# Altium PCB IM_v1.0.PcbDoc (part 3 of 4)
Units mm, origin at the board's own origin, x right, y up, seen from the top; angles counter-clockwise.
Board outline 120 x 85 mm, 6 copper layers (Top Layer, S1, S2, S3, S4, Bottom Layer), stack 1.546 mm thick; 285 components, 245 nets, 1048 pads, 483 vias.
Unrouted connection lines stored in the file: 53.
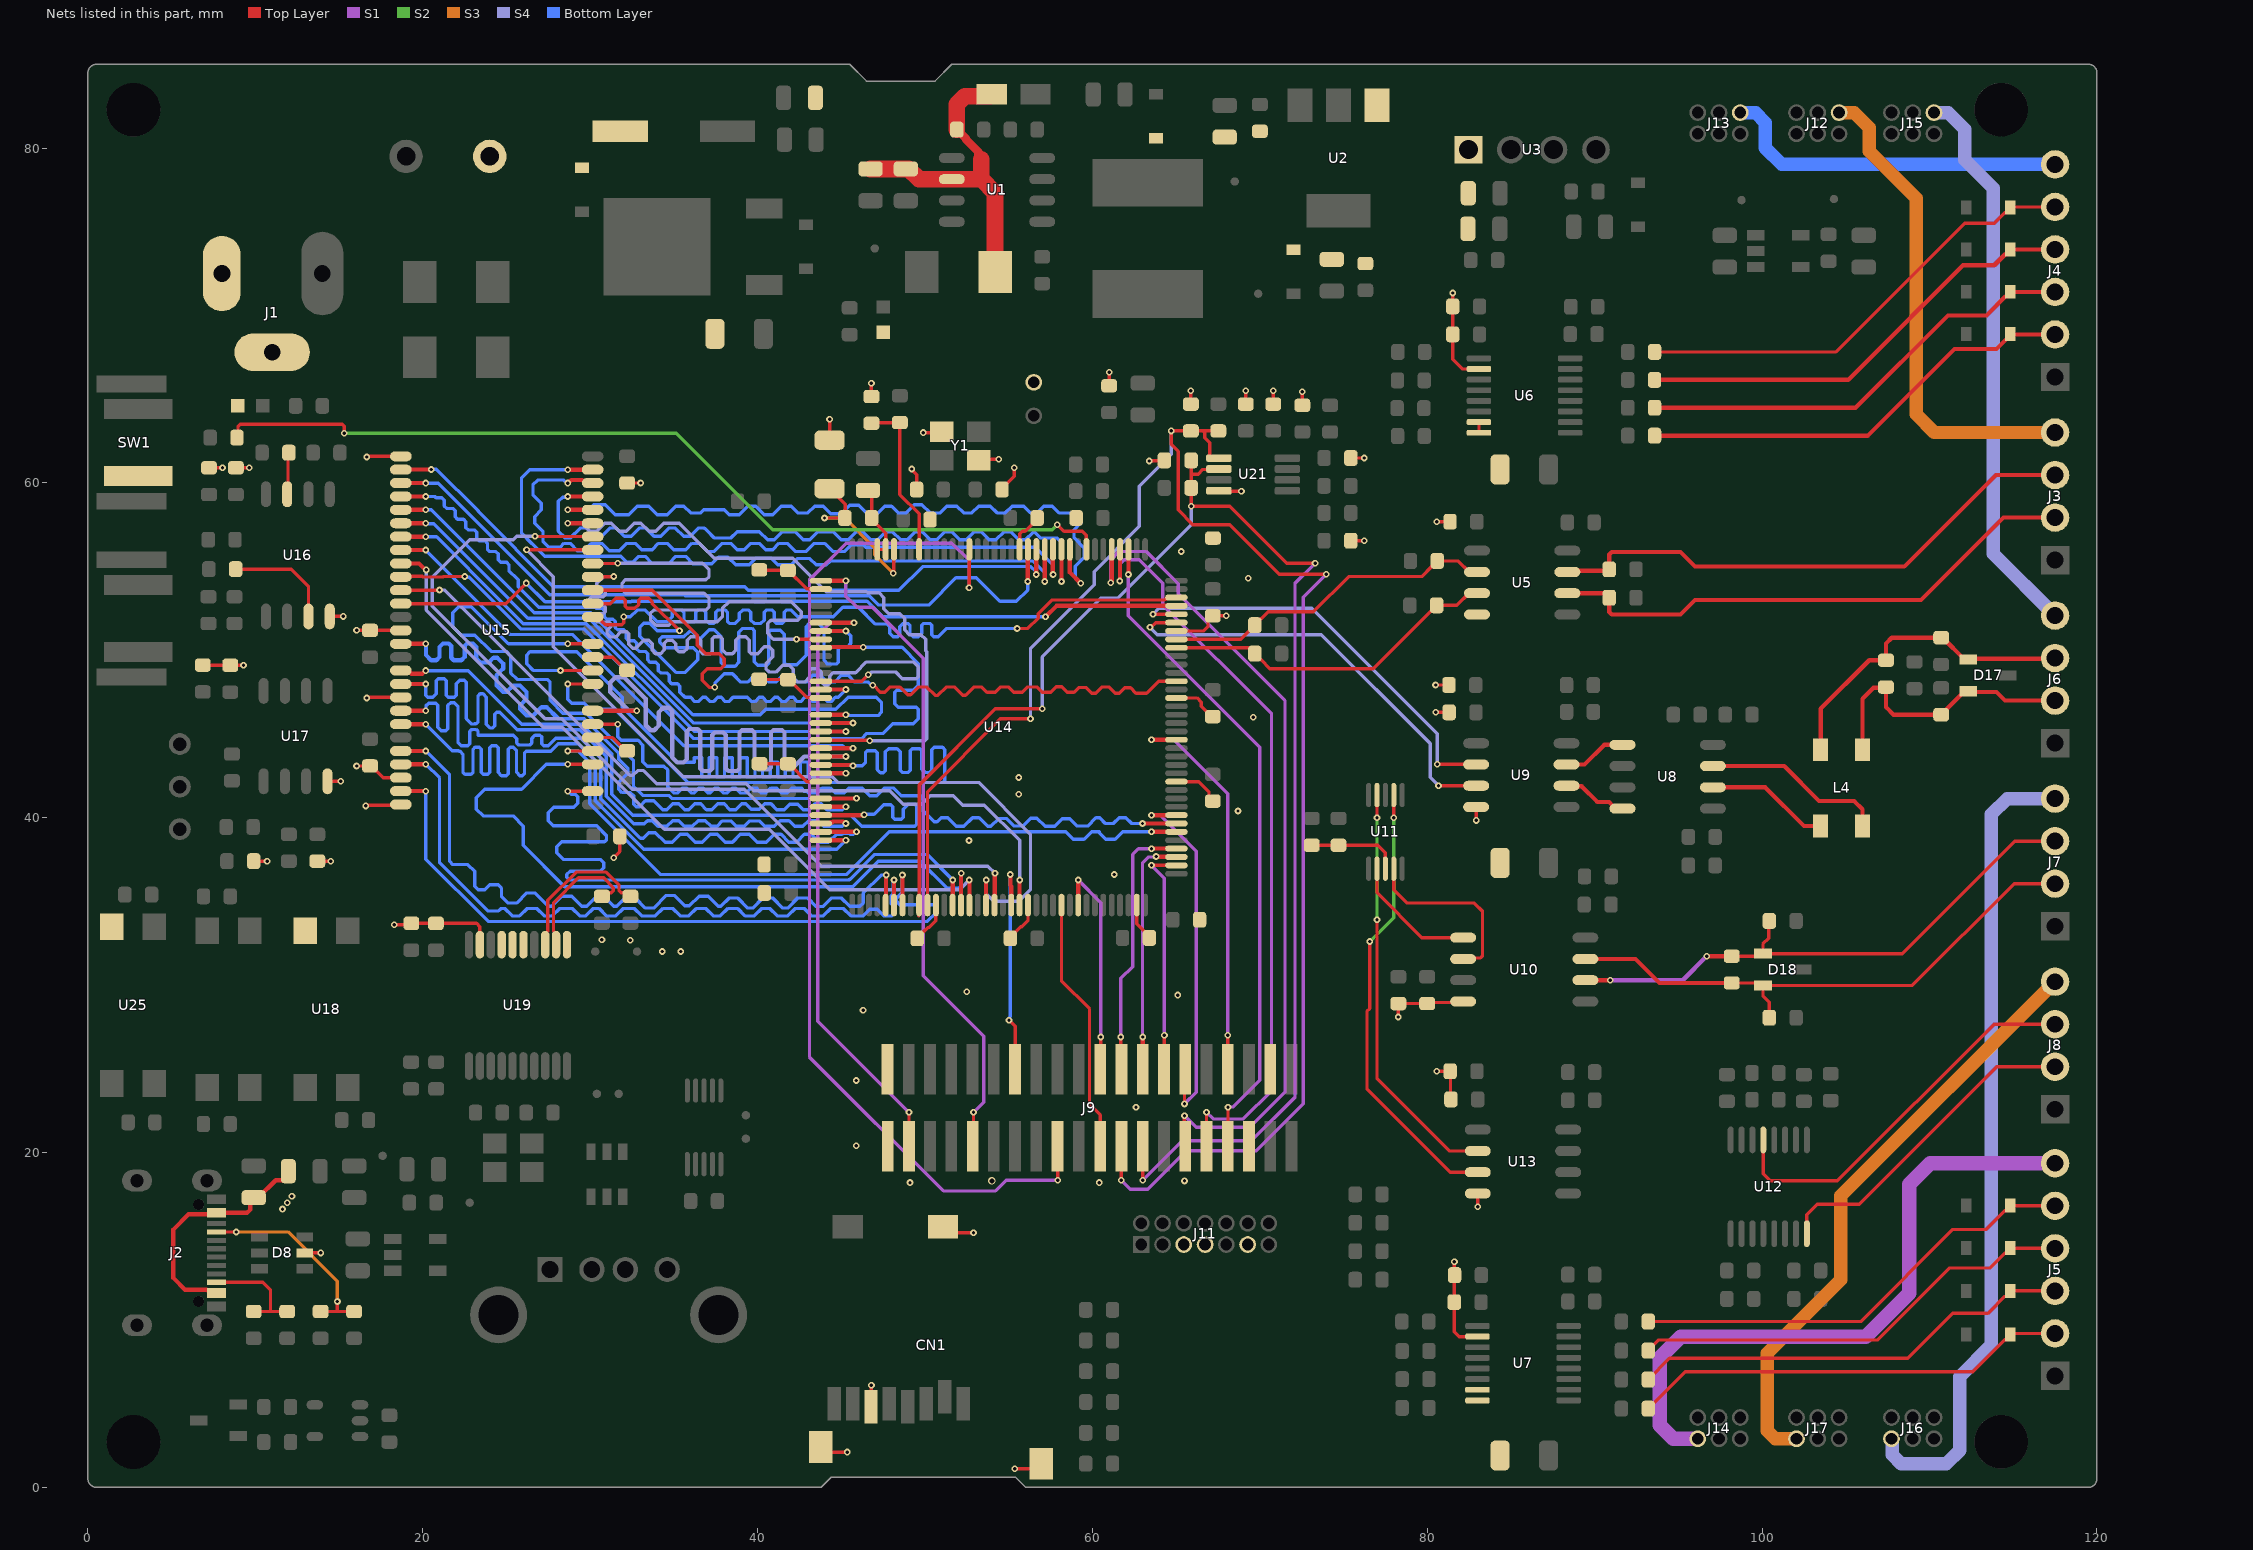
[diagram p6: the nets of this part, all layers, seen from the top]

## Via types
v1: diameter 0.4, hole 0.2, Top Layer to Bottom Layer, tented both sides, 474 vias
v2: diameter 0.4, hole 0.2, Top Layer to Bottom Layer, 8 vias
v3: diameter 0.45, hole 0.3, Top Layer to Bottom Layer, tented both sides, 1 vias

## Nets (pads, with @x,y where several pads share a name; then routed paths per layer and width w, separated by ;. In a path a pad name is that pad's centre, name@x,y a point inside that pad or via, vN(x,y) a via of type N, cw(c..) or ccw(c..) an arc to the next point about the centre after c; other vN are vias at no path point) (continued)
+VUSB: C17.2 D8.5 FB5.1 J2.A4-B9 J2.B4-A9 | length 15.6
  Top Layer w0.2: D8.5@12.95,14 v1@14,14
  Top Layer w0.254: J2.B4-A9@7.686,11.6 7.521,11.765 7.127,11.765 7.093,11.8 5.8,11.8 5.1,12.5 5.1,15.4 6.006,16.306 7.592,16.306 J2.A4-B9@7.686,16.4 9.5,16.4 9.7,16.6 9.7,17.1 C17.2@9.9,17.3 10.175,17.3 11.217,18.341 11.651,18.341 11.967,18.657 FB5.1@11.967,18.879
  other v1: 13.9,14 11.617,16.617 11.9,17 12.183,17.383
\H\O\L\D\: R50.2 U16.7 | length 2.5
  Top Layer w0.2: U16.7@11.902,59.32 11.951,59.369 11.951,61.751 R50.2@12,61.8
\W\P\: R49.2 U16.3 | length 6.6
  Top Layer w0.2: R49.2@8.824,54.845 12.155,54.845 13.172,53.828 U16.3@13.172,52.02
A: D18.1 J7.3 R38.2 R39.1 U10.6 | length 33.6
  Top Layer w0.2: R38.2@98.188,31.725 99.903,31.725 D18.1@100.053,31.875 ; R39.1@100.432,33.829 100.4,33.797 100.4,32.8 100.053,32.453 D18.1@100.053,31.875 ; J7.3@117.5,38.598 115.098,38.598 108.375,31.875 D18.1@100.053,31.875
  Top Layer w0.254: U10.6@89.445,30.29 v1(90.94,30.29) ; v1(96.693,31.725) R38.2@98.188,31.725
  S1 w0.254: v1(90.94,30.29) 95.258,30.29 v1(96.693,31.725)
ADC_1: R74.2 R75.1 U14.28 | length 9.8
  Top Layer w0.2: R75.1@46.798,63.556 46.82,63.578 48.478,63.578 R74.2@48.5,63.6 48.5,59.3 49.65,58.15 U14.28@49.65,56.02
AGND: C61.2 R48.1 U14.31 | length 10.5
  Top Layer w0.2: v1(44,57.9) C61.2@45.211,57.9 45.234,57.923 45.234,58.716 R48.1@44.3,59.65 ; v1(48.1,54.6) 48.125,54.625 48.125,55.995 U14.31@48.15,56.02
  S3 w0.2: v1(44,57.9) 45.2,57.9 47,56.1 47,55.7 v1(48.1,54.6)
AVDD: C61.1 FB4.2 U14.32 U14.33 | length 4.5
  Top Layer w0.2: FB4.2@46.6,59.55 46.811,59.339 46.811,57.834 47.65,56.995 U14.32@47.65,56.02 U14.33@47.15,56.02
B: D18.2 J7.2 R37.2 R38.1 U10.7 | length 33.3
  Top Layer w0.2: R38.1@98.188,30.125 99.903,30.125 D18.2@100.053,29.975 ; R37.2@100.432,28.047 100.432,28.968 100.053,29.347 D18.2@100.053,29.975 ; J7.2@117.5,36.058 115.058,36.058 108.975,29.975 D18.2@100.053,29.975
  Top Layer w0.254: U10.7@89.445,31.56 92.44,31.56 93.875,30.125 R38.1@98.188,30.125
BOOTLOADER_EN: R85.2 U14.8 | length 55.5
  Top Layer w0.2: R85.2@8.9,62.7 8.958,62.758 8.958,63.358 9.1,63.5 15.183,63.5 15.3,63.383 v1(15.3,62.968) ; v1(57.9,57.5) 58.3,57.1 59.4,57.1 59.621,56.879 59.621,56.049 U14.8@59.65,56.02
  S2 w0.2: v1(15.3,62.968) 35.132,62.968 40.9,57.2 57.6,57.2 v1(57.9,57.5)
CANH: U8.1 U9.7 | length 3.8
  Top Layer w0.254: U9.7@88.321,43.174 89.396,43.174 90.571,44.349 U8.1@91.662,44.349
CANL: U8.4 U9.6 | length 3.9
  Top Layer w0.254: U9.6@88.321,41.904 88.349,41.876 89.224,41.876 90.161,40.939 90.865,40.939 91.265,40.539 U8.4@91.662,40.539
CC1: J2.A5 R7.1 R8.2 | length 12.2
  Top Layer w0.2: J2.A5@7.686,15.25 v1(8.85,15.25) ; R7.1@13.9,10.5 14.9,10.5 ; v1(14.9,11.1) 14.9,10.5 ; R8.2@15.9,10.5 14.9,10.5
  S3 w0.2: v1(8.85,15.25) 11.95,15.25 14.9,12.3 v1(14.9,11.1)
CC2: J2.B5 R6.1 R9.2 | length 6.7
  Top Layer w0.2: J2.B5@7.686,12.25 10.45,12.25 10.9,11.8 10.9,10.5 ; R9.2@9.9,10.5 10.9,10.5 ; R6.1@11.9,10.5 10.9,10.5
DD_N: R94.2 U19.13 | length 9.1
  Top Layer w0.2: U19.13@27.312,32.415 27.312,33.071 27.462,33.222 27.462,35.056 29.155,36.749 30.945,36.749 31.724,35.969 31.724,35.641 31.842,35.524 32.176,35.524 R94.2@32.4,35.3
DD_P: R95.2 U19.12 | length 8
  Top Layer w0.2: U19.12@27.962,32.415 27.962,33.071 27.811,33.222 27.811,34.911 29.3,36.4 30.8,36.4 31.375,35.825 31.375,35.641 31.258,35.524 30.924,35.524 R95.2@30.7,35.3
EXT_CANH: D17.2 J6.2 L4.1 R32.1 R33.1 | length 17
  Top Layer w0.254: L4.1@106,44.05 106,47.104 106.655,47.759 107.359,47.759 R32.1@107.4,47.8 107.4,47.706 107.4,46.6 107.85,46.15 R33.1@110.7,46.15 ; R33.1@110.735,46.15 111.003,46.417 111.003,46.463 112.09,47.55 D17.2@112.315,47.55 112.365,47.5 114,47.5 114.508,46.992 J6.2@117.5,46.992
EXT_CANL: D17.1 J6.3 L4.2 R32.2 R34.1 | length 19.4
  Top Layer w0.254: L4.2@103.5,44.05 103.5,46.5 106.4,49.4 R32.2@107.4,49.4 107.4,50.4 107.75,50.75 R34.1@110.7,50.75 110.79,50.75 112.09,49.45 D17.1@112.315,49.45 112.356,49.491 117.459,49.491 J6.3@117.5,49.532
EXT_RS232_RX: J8.2 U12.8 | length 19.6
  Top Layer w0.2: U12.8@102.675,15.15 102.675,16.275 103.3,16.9 105.8,16.9 114.024,25.124 J8.2@117.5,25.124
EXT_RS232_TX: J8.3 U12.13 | length 23.5
  Top Layer w0.2: U12.13@100.075,20.75 100.075,18.725 100.5,18.3 104.5,18.3 113.864,27.664 J8.3@117.5,27.664
EXT_U5_VCC: J3.4 J12.6 | length 29.2
  S3 w0.8: J12.6@104.598,82.114 104.613,82.1 105.514,82.1 106.4,81.214 106.4,79.8 109.2,77 109.2,64.1 110.294,63.006 J3.4@117.5,63.006
EXT_U6_VCC: J4.6 J13.6 | length 21
  Bottom Layer w0.8: J13.6@98.7,82.114 98.714,82.1 99.614,82.1 100.2,81.514 100.2,80 101.18,79.02 J4.6@117.5,79.02
EXT_U7_VCC: J5.6 J14.6 | length 38.9
  S1 w0.87: J14.6@96.16,2.9 94.7,2.9 93.9,3.7 93.9,7.749 95.151,9 106.2,9 108.8,11.6 108.8,18.1 110.05,19.35 J5.6@117.5,19.35
EXT_U9_VCC: J6.4 J15.6 | length 33.5
  S4 w0.8: J15.6@110.27,82.114 110.284,82.1 111.114,82.1 112.1,81.114 112.1,79.3 113.8,77.6 113.8,55.772 J6.4@117.5,52.072
EXT_U10_VCC: J7.4 J16.6 | length 48.5
  S4 w0.8: J16.6@107.73,2.9 107.768,2.862 107.768,1.932 108.3,1.4 111,1.4 111.8,2.2 111.8,6.6 113.7,8.5 113.7,40.2 114.638,41.138 J7.4@117.5,41.138
EXT_U13_VCC: J8.4 J17.6 | length 35.9
  S3 w0.8: J17.6@102.058,2.9 100.786,2.9 100.3,3.386 100.3,8 104.7,12.4 104.7,17.404 J8.4@117.5,30.204
FDCAN1_RX: U9.3 U14.139 | length 26.4
  Top Layer w0.2: v1(63.437,51.37) 63.491,51.37 63.768,51.647 U14.139@65.117,51.647 ; v1(80.673,41.9) 80.677,41.904 U9.3@82.921,41.904
  S4 w0.2: v1(63.437,51.37) 63.879,50.927 73.673,50.927 80.171,44.429 80.171,42.402 v1(80.673,41.9)
FDCAN1_TX: U9.2 U14.140 | length 25.8
  Top Layer w0.2: v1(63.622,52.147) 63.623,52.148 U14.140@65.02,52.15 U14.140@65.02,52.15 ; v1(80.598,43.198) 80.61,43.186 82.909,43.186 U9.2@82.921,43.174
  S4 w0.2: v1(63.622,52.147) 63.976,52.5 73.1,52.5 80.598,45.002 v1(80.598,43.198)
FLT_CANH: L4.4 U8.7 | length 11
  Top Layer w0.254: U8.7@97.062,43.079 101.321,43.079 103.4,41 105.5,41 106,40.5 L4.4@106,39.5
FLT_CANL: L4.3 U8.6 | length 7.4
  Top Layer w0.254: U8.6@97.062,41.809 100.191,41.809 102.5,39.5 L4.3@103.5,39.5
FMC_A0: U14.10 U15.23 | length 44.3
  Top Layer w0.254: v1(28.65,58.385) U15.23@30.145,58.385 ; U14.10@58.65,56.02 58.65,54.65 v1(59.3,54)
  Bottom Layer w0.2: v1(28.65,58.385) 29.885,58.385 30.2,58.7 30.9,58.7 31.5,58.1 32.3,58.1 32.8,58.6 33.5,58.6 34,58.1 34.6,58.1 35.1,58.6 35.6,58.6 36,58.2 36.6,58.2 36.785,58.385 38.015,58.385 38.3,58.1 38.9,58.1 39.4,58.6 39.9,58.6 40.4,58.1 40.9,58.1 41.4,58.6 42,58.6 42.4,58.2 43,58.2 43.4,58.6 43.928,58.6 44.375,58.153 45.002,58.153 45.512,58.663 46.047,58.663 46.556,58.153 47.153,58.153 47.6,58.6 48,58.6 48.4,58.2 48.865,58.2 49.365,58.7 49.8,58.7 50.3,58.2 50.9,58.2 51.3,58.6 51.9,58.6 52.3,58.2 52.8,58.2 53.2,58.6 53.9,58.6 54.3,58.2 54.8,58.2 55.2,58.6 55.898,58.6 56.298,58.2 56.7,58.2 57.1,58.6 57.6,58.6 58,58.2 59.1,58.2 59.3,58 59.3,57.605 58.9,57.205 58.9,56.705 59.5,56.105 59.5,55.553 58.974,55.027 58.974,54.326 v1(59.3,54)
FMC_A1: U14.11 U15.24 | length 44.5
  Top Layer w0.254: v1(28.65,59.185) U15.24@30.145,59.185 ; v1(58.15,54.105) U14.11@58.15,56.02
  Bottom Layer w0.2: v1(28.65,59.185) 28.612,59.146 28.35,59.146 28.1,58.896 28.1,57.121 28.517,56.704 28.804,56.704 29.4,57.3 29.796,57.3 30.279,56.817 30.679,56.817 31.162,57.3 31.562,57.3 32.045,56.817 32.445,56.817 32.928,57.3 33.328,57.3 33.811,56.817 34.211,56.817 34.694,57.3 35.094,57.3 35.577,56.817 35.977,56.817 36.46,57.3 36.5,57.3 36.827,57.3 36.962,57.166 37.424,56.704 38.404,56.704 38.775,57.075 39.2,57.075 40.111,57.075 40.594,56.592 40.994,56.592 41.477,57.075 42.237,57.075 42.72,56.592 43.12,56.592 43.603,57.075 44.523,57.075 45.006,56.592 45.406,56.592 45.889,57.075 46.289,57.075 46.772,56.592 47.172,56.592 47.655,57.075 48.055,57.075 48.538,56.592 48.938,56.592 49.421,57.075 49.821,57.075 50.304,56.592 50.704,56.592 51.187,57.075 51.587,57.075 52.07,56.592 52.47,56.592 52.953,57.075 53.353,57.075 53.836,56.592 54.236,56.592 54.719,57.075 55.119,57.075 55.602,56.592 56.002,56.592 56.485,57.075 56.525,57.075 56.9,56.7 57.4,56.7 57.9,56.7 58.15,56.45 v1(58.15,54.105)
FMC_A2: U14.12 U15.25 | length 44.3
  Top Layer w0.254: v1(28.65,59.985) 28.689,59.985 28.872,60.168 29.521,60.168 29.704,59.985 U15.25@30.145,59.985 ; v1(57.65,54.525) 57.632,54.543 57.632,56.002 U14.12@57.65,56.02
  Bottom Layer w0.2: v1(28.65,59.985) 28.616,59.985 28.433,60.168 26.867,60.168 26.582,59.883 26.582,59.283 27.082,58.783 27.082,58.383 26.682,57.983 26.682,57.583 26.855,57.41 26.859,57.41 27.182,57.087 27.182,56.483 27.523,56.143 28.2,56.143 28.434,56.377 28.8,56.377 29.234,55.943 29.643,55.943 30.077,56.377 30.7,56.377 31.134,55.943 31.743,55.943 32.177,56.377 32.7,56.377 33.077,56 33.7,56 34.077,56.377 34.6,56.377 34.977,56 35.7,56 36.077,56.377 36.508,56.377 36.985,55.9 37.4,55.9 37.877,56.377 38.4,56.377 38.777,56 39.2,56 39.577,56.377 40.1,56.377 40.477,56 40.9,56 41.277,56.377 41.766,56.377 42.243,55.9 42.9,55.9 43.377,56.377 44,56.377 44.477,55.9 45.2,55.9 45.6,56.3 46.3,56.3 46.457,56.143 56.589,56.143 57.632,55.1 57.632,54.543 v1(57.65,54.525)
FMC_A3: U14.13 U15.26 | length 44.2
  Top Layer w0.254: v1(28.65,60.785) U15.26@30.145,60.785 ; v1(57.15,54.105) U14.13@57.15,56.02
  Bottom Layer w0.2: v1(28.65,60.785) 26.385,60.785 25.9,60.3 25.9,56.996 26.523,56.373 26.527,56.373 27.284,55.616 31.829,55.616 32.197,55.248 32.548,55.248 32.9,55.6 33.3,55.6 33.69,55.21 34.71,55.21 35.1,55.6 35.7,55.6 36.129,55.171 37.271,55.171 37.662,55.562 38.229,55.562 38.691,55.1 39.5,55.1 39.889,55.489 40.811,55.489 41.2,55.1 42,55.1 42.378,55.478 43.122,55.478 43.5,55.1 44.1,55.1 44.326,55.326 45.522,55.326 45.523,55.327 56.452,55.327 57.15,54.629 v1(57.15,54.105)
FMC_A4: U14.14 U15.29 | length 43.4
  Top Layer w0.254: U15.29@18.689,60.785 18.705,60.8 v1(20.5,60.8) ; v1(56.65,54.525) U14.14@56.65,56.02
  Bottom Layer w0.2: v1(20.5,60.8) 20.509,60.809 20.816,60.809 23.304,58.321 23.304,58.292 27.796,53.8 39.223,53.8 39.442,53.581 46.806,53.581 46.814,53.573 48.432,53.573 49.859,55 56.316,55 56.612,54.704 56.612,54.563 v1(56.65,54.525)
FMC_A5: U14.15 U15.30 | length 44.4
  Top Layer w0.254: U15.30@18.689,59.985 v1(20.185,59.985) ; v1(56.131,54.105) 56.14,54.115 56.14,56.01 U14.15@56.15,56.02
  Bottom Layer w0.2: v1(20.185,59.985) 20.915,59.985 27.592,53.308 35.63,53.308 35.684,53.254 46.671,53.254 47.225,52.7 50.216,52.7 51.847,54.331 53.072,54.331 54.475,52.928 55.462,52.928 56.131,53.597 v1(56.131,54.105)
FMC_A6: U14.50 U15.31 | length 38.5
  Top Layer w0.254: U15.31@18.689,59.185 v1(20.185,59.185) ; U14.50@43.78,47.65 v1(45.275,47.65)
  Bottom Layer w0.2: v1(20.185,59.185) 20.715,59.185 20.786,59.114 21.147,59.114 21.288,58.973 21.288,58.612 21.43,58.47 21.79,58.47 21.932,58.329 21.932,57.968 22.073,57.827 22.434,57.827 22.575,57.686 22.575,57.325 22.716,57.184 23.077,57.184 23.219,57.042 23.219,56.681 23.36,56.54 23.721,56.54 23.862,56.399 23.862,56.038 24.003,55.897 24.364,55.897 24.505,55.755 24.505,55.395 24.647,55.253 25.008,55.253 25.149,55.112 25.149,54.751 25.632,54.268 25.7,54.2 25.7,53.8 26.927,52.573 30.281,52.573 30.352,52.502 30.712,52.502 30.854,52.361 30.854,52 30.995,51.859 31.356,51.859 31.497,51.717 31.497,51.357 31.639,51.215 31.999,51.215 32.141,51.074 32.141,50.713 32.282,50.572 32.643,50.572 32.784,50.43 32.784,50.07 32.926,49.928 33.286,49.928 33.428,49.787 33.428,49.426 33.569,49.285 33.93,49.285 34.071,49.144 34.071,48.783 34.213,48.641 34.573,48.641 34.715,48.5 34.715,48.139 34.856,47.998 35.217,47.998 35.358,47.857 35.358,47.496 35.663,47.191 35.9,47.191 36,47.191 36.255,46.936 36.455,46.936 36.71,47.191 36.91,47.191 37.165,46.936 37.365,46.936 37.62,47.191 37.82,47.191 38.075,46.936 38.275,46.936 38.53,47.191 39.39,47.191 39.645,46.936 39.845,46.936 40.1,47.191 40.3,47.191 40.555,46.936 40.755,46.936 41.01,47.191 41.21,47.191 41.465,46.936 41.665,46.936 41.92,47.191 42.12,47.191 42.375,46.936 42.575,46.936 42.83,47.191 43.03,47.191 43.285,46.936 43.485,46.936 43.74,47.191 43.94,47.191 44.195,46.936 44.395,46.936 44.65,47.191 44.816,47.191 v1(45.275,47.65)
FMC_A7: U14.53 U15.32 | length 38.7
  Top Layer w0.254: U15.32@18.689,58.385 v1(20.185,58.385) ; U14.53@43.78,46.15 v1(45.275,46.15)
  Bottom Layer w0.2: v1(20.185,58.385) 20.515,58.385 26.654,52.246 30.042,52.246 36.138,46.15 40.15,46.15 40.473,46.473 44.673,46.473 45.4,47.2 47.1,47.2 47.4,46.9 47.4,46.3 47.2,46.1 45.467,46.1 45.455,46.112 45.314,46.112 v1(45.275,46.15)
FMC_A8: U14.54 U15.33 | length 33.9
  Top Layer w0.254: U15.33@18.689,57.585 v1(20.185,57.585) ; U14.54@43.78,45.65 v1(45.7,45.65)
  Bottom Layer w0.2: v1(20.185,57.585) 20.223,57.546 20.654,57.546 24.2,54 26.281,51.919 29.907,51.919 36.176,45.65 v1(45.7,45.65)
FMC_A9: U14.55 U15.34 | length 32.9
  Top Layer w0.254: U15.34@18.689,56.785 v1(20.185,56.785) ; U14.55@43.78,45.15 v1(45.275,45.15)
  Bottom Layer w0.2: v1(20.185,56.785) 20.192,56.778 20.822,56.778 24.692,52.908 26.008,51.592 29.771,51.592 36.214,45.15 v1(45.275,45.15)
FMC_A10: U14.56 U15.22 | length 40.1
  Top Layer w0.2: U14.56@43.78,44.65 43.805,44.625 46.675,44.625 v1(46.7,44.6)
  Top Layer w0.254: v1(28.65,57.585) U15.22@30.145,57.585
  S4 w0.2: v1(28.65,57.585) 29.398,57.585 29.498,57.585 29.981,57.102 30.381,57.102 30.864,57.585 31.264,57.585 31.747,57.102 32.147,57.102 32.63,57.585 33.03,57.585 33.513,57.102 33.913,57.102 34.396,57.585 35.147,57.585 35.315,57.585 37.4,55.5 42.1,55.5 44.1,53.5 46.5,53.5 46.571,53.429 47.254,53.429 47.537,53.146 47.537,52.463 47.819,52.181 48.503,52.181 48.785,51.898 48.785,51.215 49.068,50.932 49.751,50.932 50.034,50.649 50.034,49.966 50.1,49.9 50.1,49.7 50.1,44.717 49.983,44.6 v1(46.7,44.6)
FMC_A11: U14.57 U15.35 | length 33.8
  Top Layer w0.254: U15.35@18.689,55.985 v1(20.185,55.985) ; U14.57@43.78,44.15 v1(45.7,44.15)
  Bottom Layer w0.2: v1(20.185,55.985) 25.231,50.938 28.962,50.938 35.6,44.3 45.071,44.3 45.221,44.15 v1(45.7,44.15)
FMC_A12: U14.87 U15.36 | length 45.2
  Top Layer w0.254: U15.36@18.689,55.185 19.772,55.185 20.159,54.798 v1(20.198,54.798) ; U14.87@52.65,34.78 v1(52.65,36.275)
  S4 w0.2: v1(20.198,54.798) 20.198,52.402 27.2,45.4 28.338,45.4 34.438,39.3 40.7,39.3 44.3,35.7 52.075,35.7 v1(52.65,36.275)
FMC_BA0: U14.89 U15.20 | length 52.3
  Top Layer w0.2: v1(26.2,56) 26.208,55.992 30.138,55.992 U15.20@30.145,55.985
  Top Layer w0.254: U14.89@53.65,34.78 v1(53.65,36.275)
  S4 w0.2: v1(26.2,56) 27.8,54.4 27.8,50.2 35.564,42.436 44.464,42.436 44.8,42.1 53.2,42.1 56.3,39 56.3,35.7 55.6,35 54.1,35 53.65,35.45 v1(53.65,36.275)
FMC_BA1: U14.90 U15.21 | length 54.5
  Top Layer w0.2: v1(26.7,56.8) 26.708,56.792 30.138,56.792 U15.21@30.145,56.785
  Top Layer w0.254: U14.90@54.15,34.78 54.165,34.795 54.165,36.658 v1(54.181,36.673)
  S4 w0.2: v1(26.7,56.8) 25.6,56.8 25.4,56.6 22.8,56.6 20.573,54.373 20.573,52.627 27.3,45.9 28.3,45.9 32.5,41.7 39.2,41.7 43.8,37.1 53.754,37.1 v1(54.181,36.673)
FMC_D0: U14.85 U15.2 | length 44.5
  Top Layer w0.2: v1(28.65,41.585) U15.2@30.145,41.585
  Top Layer w0.254: U14.85@51.65,34.78 v1(51.65,36.275)
  Bottom Layer w0.2: v1(28.65,41.585) 28.683,41.585 28.867,41.4 29.1,41.4 29.249,41.251 29.249,40.845 29.018,40.614 27.811,40.614 27.486,40.289 27.486,39.811 27.792,39.506 30.394,39.506 30.973,38.927 30.973,38.667 30.856,38.55 28.293,38.55 28,38.257 28,37.9 28.4,37.5 30.6,37.5 30.8,37.3 30.8,37 30.6,36.8 28.8,36.8 28.607,36.607 28.607,36.442 28.776,36.273 45.435,36.273 45.487,36.325 45.525,36.325 47,37.8 50.125,37.8 v1(51.65,36.275)
FMC_D1: U14.86 U15.4 | length 44
  Top Layer w0.2: v1(28.65,43.185) U15.4@30.145,43.185
  Top Layer w0.254: U14.86@52.15,34.78 52.155,34.785 52.155,36.668 v1(52.161,36.673)
  Bottom Layer w0.2: v1(28.65,43.185) 27.385,43.185 25.9,41.7 23.7,41.7 23.2,41.2 23.2,40.5 23.6,40.1 25.4,40.1 26,39.5 26,38.338 28.465,35.873 45.673,35.873 47.2,37.4 49.7,37.4 51.3,35.8 52.033,35.8 52.161,35.928 v1(52.161,36.673)
FMC_D2: U14.114 U15.5 | length 44.2
  Top Layer w0.2: v1(28.65,43.985) U15.5@30.145,43.985
  Top Layer w0.254: v1(63.525,39.15) U14.114@65.02,39.15
  Bottom Layer w0.2: v1(28.65,43.985) 29.253,43.985 29.973,43.265 29.973,40.865 30,40.838 30,40.8 34.2,36.6 45.3,36.6 47.85,39.15 58.4,39.15 58.85,38.7 59.5,38.7 59.95,39.15 60.416,39.15 60.416,39.084 60.8,38.7 61.35,38.7 61.8,39.15 v1(63.525,39.15)
FMC_D3: U14.115 U15.7 | length 44.4
  Top Layer w0.2: U15.7@30.145,45.585 v1(31.641,45.585)
  Top Layer w0.254: v1(62.987,39.65) U14.115@65.02,39.65
  Bottom Layer w0.2: v1(31.641,45.585) 31.641,44.834 31.858,44.617 32.857,44.617 33.145,44.328 33.145,43.33 33.399,43.076 34.398,43.076 34.626,42.847 34.626,41.849 35.001,41.474 35.235,41.474 35.534,41.773 35.732,41.773 36.031,41.474 36.212,41.474 36.511,41.773 36.733,41.773 37.015,41.491 37.181,41.491 37.446,41.755 37.662,41.755 37.944,41.474 38.199,41.474 38.473,41.748 38.698,41.748 38.972,41.474 39.328,41.474 39.626,41.773 39.91,41.773 40.105,41.578 40.122,41.578 40.226,41.474 40.5,41.474 40.799,41.773 41.127,41.773 41.426,41.474 41.774,41.474 42.073,41.773 42.597,41.773 42.793,41.578 42.922,41.578 43.026,41.474 43.574,41.474 43.873,41.773 44.327,41.773 44.626,41.474 45.174,41.474 45.473,41.773 46.227,41.773 46.7,41.3 47.127,41.3 47.6,41.773 48.1,41.773 48.573,41.3 49.7,41.3 49.9,41.1 49.9,40.4 50.553,39.747 50.719,39.747 50.971,40 51.352,40 51.875,39.477 52.313,39.477 52.836,40 53.226,40 53.749,39.477 53.94,39.477 54.409,39.946 54.879,39.946 55.326,39.5 55.851,39.5 56.316,39.965 56.685,39.965 57.173,39.477 57.741,39.477 58.203,39.939 58.653,39.939 59.092,39.5 59.725,39.5 60.21,39.986 60.444,39.986 60.779,39.65 61.25,39.65 61.6,40 62,40 62.35,39.65 v1(62.987,39.65)
FMC_D4: U14.58 U15.8 | length 44.6
  Top Layer w0.254: U15.8@30.145,46.385 v1(32.785,46.385) ; U14.58@43.78,43.65 v1(45.275,43.65)
  S4 w0.254: v1(32.785,46.385) 32.32,46.385 31.2,47.505 31.2,48.077 31.512,48.388 32.023,48.388 33.316,47.095 33.316,45.522 33.614,45.224 33.824,45.224 34.1,45.5 34.1,46.3 34.363,46.563 34.693,46.563 34.9,46.356 34.9,43.601 35.201,43.3 35.568,43.3 35.774,43.506 35.774,45.147 35.923,45.296 36.425,45.296 36.574,45.147 36.574,42.938 36.723,42.79 37.145,42.79 37.294,42.938 37.294,44.943 37.443,45.092 37.951,45.092 38.1,44.943 38.1,42.938 38.249,42.79 38.77,42.79 38.919,42.938 38.919,45.073 39.068,45.222 39.662,45.222 39.811,45.073 39.811,43.117 40.053,42.875 40.685,42.875 40.8,42.99 40.8,45.083 40.949,45.231 41.451,45.231 41.6,45.083 41.6,43.024 41.749,42.875 42.008,42.875 42.783,43.65 v1(45.275,43.65)
FMC_D5: U14.59 U15.10 | length 44.6
  Top Layer w0.2: v1(28.65,47.985) U15.10@30.145,47.985
  Top Layer w0.254: U14.59@43.78,43.15 45.611,43.15 45.66,43.1 v1(45.7,43.1)
  Bottom Layer w0.2: v1(28.65,47.985) 28.65,47.077 28.896,46.831 29.643,46.831 30.008,46.466 30.956,46.466 30.959,46.469 31.467,46.469 35.836,42.1 51.061,42.1 51.178,42.217 51.178,44.067 51.046,44.2 50.538,44.2 50.4,44.062 50.4,42.817 50.283,42.7 50,42.7 49.8,42.9 49.8,43.973 49.815,43.988 49.698,44.105 49.234,44.105 49.117,43.988 49.117,42.817 49,42.7 48.643,42.7 48.526,42.817 48.526,43.927 48.328,44.124 47.831,44.124 47.634,43.928 47.634,42.796 47.517,42.679 47.337,42.679 47.144,42.871 47.144,43.883 47.027,44 46.56,44 46.442,43.883 46.442,43.288 46.258,43.104 45.704,43.104 v1(45.7,43.1)
FMC_D6: U14.60 U15.11 | length 44
  Top Layer w0.2: v1(28.23,48.789) 28.232,48.787 30.143,48.787 U15.11@30.145,48.785
  Top Layer w0.254: U14.60@43.78,42.65 v1(45.275,42.65)
  Bottom Layer w0.2: v1(28.23,48.789) 26.611,48.789 26.2,49.2 26.2,49.7 26.4,49.9 29.2,49.9 31.906,47.194 31.906,46.602 35.209,43.3 36.109,43.3 36.209,43.3 36.209,43.573 36.663,43.573 36.663,42.427 37.117,42.427 37.117,43.573 37.571,43.573 37.571,42.427 38.025,42.427 38.025,43.573 38.479,43.573 38.479,42.427 38.933,42.427 38.933,43.573 39.387,43.573 39.387,42.427 39.841,42.427 39.841,43.323 40.295,43.323 40.295,42.427 40.749,42.427 40.749,43.323 41.203,43.323 41.203,42.427 41.657,42.427 41.657,43.323 42.111,43.323 42.111,42.427 42.565,42.427 42.565,43.323 43.019,43.323 43.019,42.427 43.473,42.427 43.473,42.65 43.95,42.65 v1(45.275,42.65)
FMC_D7: U14.63 U15.13 | length 42.9
  Top Layer w0.2: v1(28.65,50.385) U15.13@30.145,50.385
  Top Layer w0.254: U14.63@43.78,41.15 v1@45.909,41.15
  Bottom Layer w0.2: v1(28.65,50.385) 25.115,50.385 22.908,52.592 22.151,52.592 21.8,52.241 21.8,51.4 22.3,50.9 23.1,50.9 24.075,49.925 24.975,49.925 25.261,49.639 25.261,48.639 25.646,48.254 27.446,48.254 27.6,48.1 27.6,47 28.365,46.235 29.777,46.235 32.582,43.43 32.582,41.88 33.135,41.327 34.685,41.327 34.865,41.147 45.908,41.147 v1(45.91,41.149)
FMC_D8: U14.64 U15.42 | length 43.6
  Top Layer w0.254: U15.42@18.689,50.385 v1(20.185,50.385) ; U14.64@43.78,40.65 v1(45.275,40.65)
  Bottom Layer w0.2: 28.084,45.935 28.111,45.908 29.642,45.908 31.7,43.85 31.7,43.496 32.255,42.94 32.255,42.656 31.7,42.101 31.7,41.7 31.9,41.5 32.4,41.5 32.6,41.3 32.6,40.8 32.75,40.65 32.95,40.65 33.3,41 33.8,41 34.323,40.477 34.577,40.477 34.92,40.82 35.3,40.82 35.643,40.477 35.9,40.477 36.243,40.82 36.6,40.82 36.943,40.477 37.261,40.477 37.284,40.5 37.3,40.5 37.62,40.82 38,40.82 38.343,40.477 38.7,40.477 39.043,40.82 39.3,40.82 39.62,40.5 40.1,40.5 40.42,40.82 40.8,40.82 41.143,40.477 41.6,40.477 41.805,40.682 ; 41.805,40.683 41.923,40.8 42.4,40.8 42.723,40.477 43.083,40.477 43.426,40.82 43.8,40.82 44.143,40.477 45.058,40.477 45.231,40.65 v1(45.275,40.65)
  Bottom Layer w0.254: v1(20.185,50.385) 20.185,49.715 20.5,49.4 20.8,49.4 21,49.6 21,50.2 21.2,50.4 21.551,50.4 21.7,50.251 21.7,49.549 21.849,49.4 22.3,49.4 22.5,49.6 22.5,50.251 22.649,50.4 23,50.4 23.2,50.2 23.2,49.5 23.433,49.267 23.94,49.267 24.231,49.558 24.442,49.558 24.8,49.2 24.8,48.9 24.4,48.5 24.4,47.9 24.795,47.505 25.005,47.505 25.4,47.9 25.8,47.9 26.2,47.5 26.2,47.1 25.805,46.705 25.805,46.495 26.2,46.1 26.6,46.1 27.1,46.6 27.4,46.6 28.065,45.935 28.084,45.935
FMC_D9: U14.65 U15.44 | length 44.7
  Top Layer w0.254: U15.44@18.689,48.785 19.131,48.785 19.325,48.59 19.963,48.59 20.157,48.785 v1(20.185,48.785) ; U14.65@43.78,40.15 46.345,40.15 v1(46.36,40.165)
  Bottom Layer w0.2: v1(20.185,48.785) 22.715,48.785 25.919,45.581 29.506,45.581 31.281,43.806 31.281,41.406 32.537,40.15 45.55,40.15 46.21,39.49 49.377,39.49 49.494,39.607 49.494,40.683 49.377,40.8 49,40.8 48.7,40.5 48.7,40.017 48.583,39.9 48.195,39.9 48.078,40.017 48.078,40.649 47.961,40.766 47.522,40.766 46.956,40.2 46.395,40.2 v1(46.36,40.165)
FMC_D10: U14.66 U15.45 | length 44.3
  Top Layer w0.254: U15.45@18.689,47.985 v1(20.185,47.985) ; U14.66@43.78,39.65 44.306,39.65 44.377,39.721 44.458,39.721 44.506,39.769 45.117,39.769 45.236,39.65 v1(45.275,39.65)
  Bottom Layer w0.2: v1(20.185,47.985) 20.185,47.317 20.302,47.2 20.6,47.2 20.8,47.4 20.8,48.183 20.917,48.3 21.283,48.3 21.4,48.183 21.4,47.317 21.517,47.2 21.883,47.2 22,47.317 22,48 22.2,48.2 22.483,48.2 22.6,48.083 22.6,45.918 22.926,45.592 23.092,45.592 23.1,45.6 23.183,45.6 23.3,45.717 23.3,47.283 23.417,47.4 23.6,47.4 23.8,47.2 23.8,45.573 24.014,45.359 24.18,45.359 24.3,45.479 24.3,46.183 24.417,46.3 24.6,46.3 25.646,45.254 29.371,45.254 30.954,43.671 30.954,41.271 32.589,39.635 33.235,39.635 33.423,39.823 33.7,39.823 34.046,39.477 34.577,39.477 34.923,39.823 35.283,39.823 35.629,39.477 36.1,39.477 36.446,39.823 36.877,39.823 37.223,39.477 37.577,39.477 37.9,39.8 38.4,39.8 38.723,39.477 39.2,39.477 39.523,39.8 40.1,39.8 40.423,39.477 41,39.477 41.346,39.823 41.877,39.823 42.223,39.477 42.7,39.477 43.046,39.823 43.6,39.823 43.946,39.477 45.058,39.477 45.231,39.65 v1(45.275,39.65)
FMC_D11: U14.67 U15.47 | length 44.1
  Top Layer w0.254: U15.47@18.689,46.385 v1(20.185,46.385) ; U14.67@43.78,39.15 v1(45.91,39.15)
  Bottom Layer w0.2: v1(20.185,46.385) 20.192,46.392 20.192,46.685 20.349,46.842 20.773,46.842 20.89,46.725 20.89,45.81 20.9,45.8 20.9,45.4 21.1,45.2 21.383,45.2 21.5,45.317 21.5,46.7 21.673,46.873 21.883,46.873 22.1,46.656 22.1,44.5 22.3,44.3 22.683,44.3 22.8,44.417 22.8,45.148 22.917,45.265 23.183,45.265 23.3,45.148 23.3,44.927 25.4,44.927 25.616,44.711 25.616,44.456 25.733,44.339 26.383,44.339 26.5,44.456 26.5,44.727 26.7,44.927 27,44.927 27.1,44.827 27.1,44.417 27.217,44.3 27.508,44.3 27.947,44.739 29.424,44.739 30.627,43.535 30.627,41.135 33.004,38.759 33.159,38.759 33.5,39.1 33.9,39.1 34.471,38.529 34.9,38.529 35.371,39 35.8,39 36.271,38.529 36.7,38.529 37.171,39 37.6,39 38.071,38.529 38.5,38.529 38.971,39 39.5,39 39.971,38.529 40.529,38.529 41,39 41.4,39 41.871,38.529 42.329,38.529 42.8,39 43.2,39 43.671,38.529 44.224,38.529 44.341,38.647 ; 44.341,38.647 44.684,38.99 45.012,38.99 45.098,39.077 45.452,39.077 45.527,39.002 45.708,39.002 45.856,39.15 v1(45.91,39.15)
FMC_D12: U14.68 U15.48 | length 44.8
  Top Layer w0.254: U15.48@18.689,45.585 v1(20.185,45.585) ; U14.68@43.78,38.65 v1(45.275,38.65)
  Bottom Layer w0.2: v1(20.185,45.585) 21.769,44 22.138,44 22.165,43.973 22.227,43.973 22.4,43.8 22.4,42.717 22.517,42.6 22.883,42.6 23,42.717 23,44.083 23.117,44.2 23.383,44.2 23.5,44.083 23.5,42.717 23.617,42.6 23.883,42.6 24,42.717 24,44.183 24.117,44.3 24.383,44.3 24.5,44.183 24.5,42.7 24.7,42.5 24.983,42.5 25.1,42.617 25.1,44.083 25.217,44.2 25.4,44.2 25.6,44 25.6,42.7 25.789,42.511 25.955,42.511 26.072,42.628 26.072,43.848 26.189,43.965 27.635,43.965 28.082,44.412 29.288,44.412 30.3,43.4 30.3,41 33.189,38.111 44.737,38.111 v1(45.275,38.65)
FMC_D13: U14.77 U15.50 | length 44.7
  Top Layer w0.254: U15.50@18.689,43.985 v1(20.185,43.985) ; U14.77@47.65,34.78 47.663,34.793 47.663,36.56 v1(47.677,36.573)
  Bottom Layer w0.2: v1(20.185,43.985) 21.6,42.569 21.6,37.4 21.8,37.2 22.7,37.2 23.1,36.8 23.1,35.9 23.3,35.7 23.7,35.7 24,36 24.5,36 24.7,35.8 24.7,35.3 25.1,34.9 25.6,34.9 26.2,35.5 26.7,35.5 27.5,34.7 27.7,34.7 28.3,35.3 28.9,35.3 29.5,34.7 29.8,34.7 30.4,35.3 30.8,35.3 31.4,34.7 31.6,34.7 32.1,35.2 32.7,35.2 33.3,34.6 33.8,34.6 34.551,35.351 35.021,35.351 35.643,34.729 35.929,34.729 36.5,35.3 37.05,35.3 37.642,34.708 37.808,34.708 38.3,35.2 38.8,35.2 39.4,34.6 39.7,34.6 40.3,35.2 40.9,35.2 41.5,34.6 41.8,34.6 42.4,35.2 42.992,35.2 43.504,34.688 43.892,34.688 44.402,35.198 44.667,35.198 44.669,35.2 45,35.2 45.5,34.7 46.1,34.7 46.3,34.9 46.3,35.5 47.371,36.571 47.675,36.571 v1(47.677,36.573)
FMC_D14: U14.78 U15.51 | length 44.1
  Top Layer w0.254: U15.51@18.689,43.185 v1(20.185,43.185) ; U14.78@48.15,34.78 v1(48.15,36.275)
  Bottom Layer w0.2: v1(20.185,43.185) 21,42.369 21,37.3 23.873,34.427 24.527,34.427 24.673,34.573 24.9,34.573 25.346,34.127 25.781,34.127 26.227,34.573 26.8,34.573 27.246,34.127 27.727,34.127 28.173,34.573 28.927,34.573 29.373,34.127 29.727,34.127 30.173,34.573 30.527,34.573 30.973,34.127 31.527,34.127 31.973,34.573 32.625,34.573 33.071,34.127 33.9,34.127 34.346,34.573 34.927,34.573 35.373,34.127 35.9,34.127 36.346,34.573 36.9,34.573 37.346,34.127 37.783,34.127 38.229,34.573 38.8,34.573 39.246,34.127 39.8,34.127 40.246,34.573 40.727,34.573 41.173,34.127 41.8,34.127 42.246,34.573 42.8,34.573 43.1,34.273 43.1,34.244 43.217,34.127 43.927,34.127 44.373,34.573 45.129,34.573 45.575,34.127 46.3,34.127 46.697,34.524 47.144,34.524 47.54,34.127 48.027,34.127 48.2,34.3 48.2,34.638 47.973,34.865 47.973,35.335 48.094,35.456 48.094,36.078 48.112,36.096 48.112,36.237 v1(48.15,36.275)
FMC_D15: U14.79 U15.53 | length 44.2
  Top Layer w0.254: U15.53@18.689,41.585 v1(20.185,41.585) ; U14.79@48.65,34.78 v1(48.65,36.573)
  Bottom Layer w0.2: v1(20.185,41.585) 20.185,37.515 23.9,33.8 50.142,33.8 50.7,34.358 50.7,34.6 50.5,34.8 48.5,34.8 48.3,35 48.3,35.2 48.65,35.55 v1(48.65,36.573)
FMC_NBL0: U14.141 U15.39 | length 48
  Top Layer w0.2: U15.39@18.689,52.785 24.963,52.785 v1(26.189,54.011)
  Top Layer w0.254: v1(57.2,52) 57.85,52.65 U14.141@65.02,52.65
  Bottom Layer w0.2: v1(26.189,54.011) 27.3,52.9 32.438,52.9 32.465,52.927 46.535,52.927 47.462,52 v1(57.2,52)
FMC_NBL1: U14.142 U15.15 | length 47.6
  Top Layer w0.2: U15.15@30.145,51.985 30.438,51.985 30.911,51.512 31.883,51.512 32,51.629 v1(32,52) ; v1(55.5,51.3) 56.15,51.3 56.773,51.923 56.773,52.177 57.6,53.004 64.305,53.004 64.353,53.052 64.381,53.052 64.479,53.15 U14.142@65.02,53.15
  Bottom Layer w0.2: v1(32,52) 32.4,52 32.8,52.4 33.3,52.4 34,51.7 34.6,51.7 34.9,52 34.9,52.283 35.017,52.4 35.483,52.4 35.6,52.283 35.6,51.817 35.717,51.7 36.183,51.7 36.3,51.817 36.3,52.283 36.417,52.4 36.783,52.4 36.9,52.283 36.9,51.8 37.1,51.6 37.383,51.6 37.5,51.717 37.5,52.283 37.617,52.4 38.083,52.4 38.2,52.283 38.2,51.717 38.317,51.6 38.659,51.6 38.9,51.841 38.9,52.2 39.1,52.4 39.483,52.4 39.6,52.283 39.6,51.8 39.8,51.6 40.2,51.6 40.4,51.8 40.4,52.283 40.517,52.4 40.883,52.4 41,52.283 41,51.717 41.117,51.6 41.483,51.6 41.6,51.717 41.6,52.283 41.717,52.4 42,52.4 42.4,52 44.521,52 45.098,52.577 46.027,52.577 47.039,51.565 47.735,51.565 47.9,51.4 47.9,51 48.1,50.8 48.383,50.8 48.5,50.917 48.5,51.4 48.7,51.6 48.983,51.6 49.1,51.483 49.1,51 49.3,50.8 49.6,50.8 49.8,51 49.8,51.483 49.917,51.6 50.283,51.6 50.4,51.483 50.4,50.917 50.517,50.8 50.8,50.8 51.3,51.3 v1(55.5,51.3)
FMC_SDCKE0: U14.45 U15.37 | length 47.3
  Top Layer w0.2: U15.37@18.689,54.385 18.724,54.419 19.973,54.419 20.021,54.371 21.2,54.371 21.229,54.4 v1(22.5,54.4)
  Top Layer w0.254: U14.45@43.78,50.15 43.798,50.168 44.366,50.168 44.386,50.188 v1@46.301,50.188
  Bottom Layer w0.2: v1(22.5,54.4) 22.535,54.365 22.772,54.365 24.365,52.773 25.873,51.265 29.636,51.265 36.178,44.723 46.219,44.723 46.523,45.027 47.5,45.027 48.073,45.6 49.3,45.6 49.6,45.9 49.6,46.483 49.483,46.6 48.4,46.6 48.2,46.8 48.2,47.483 48.317,47.6 49.3,47.6 49.6,47.9 49.6,49.2 48.627,50.173 v1(46.317,50.173)
FMC_SDCLK: U14.93 U15.38 | length 47.7
  Top Layer w0.2: U15.38@18.689,53.585 18.697,53.592 20.992,53.592 v1(21,53.6)
  Top Layer w0.254: U14.93@55.65,34.78 v1(55.65,36.275)
  S4 w0.2: v1(21,53.6) 21.004,53.596 21.304,53.596 32.377,42.523 32.542,42.523 32.833,42.813 33.186,42.813 33.973,42.027 39.335,42.027 39.762,41.6 47.9,41.6 48.7,40.8 49.8,40.8 50.3,41.3 51.7,41.3 52.25,40.75 53.55,40.75 55.65,38.65 v1(55.65,36.275)
FMC_SDNCAS: U14.132 U15.17 | length 46.3
  Top Layer w0.2: U15.17@30.145,53.585 33.715,53.585 36.4,50.9 36.4,50.3 36.9,49.8 37.7,49.8 38,49.5 38,49.1 37.8,48.9 37,48.9 36.7,48.6 36.7,48.2 37.127,47.773 37.435,47.773 v1(37.446,47.784) ; v1(46.873,47.9) 46.927,47.9 47.327,47.5 47.6,47.5 47.9,47.8 48.509,47.8 48.971,47.337 49.137,47.337 49.6,47.8 50.1,47.8 50.604,47.296 50.769,47.296 51.273,47.8 51.773,47.8 52.254,47.319 52.419,47.319 52.9,47.8 53.4,47.8 53.7,47.5 54.2,47.5 54.5,47.8 55,47.8 55.3,47.5 55.8,47.5 56.1,47.8 56.7,47.8 57,47.5 57.5,47.5 57.825,47.825 58.175,47.825 58.5,47.5 58.9,47.5 59.173,47.773 59.627,47.773 59.967,47.433 60.2,47.433 60.567,47.8 61,47.8 61.367,47.433 61.6,47.433 61.924,47.757 62.276,47.757 62.6,47.433 63.233,47.433 63.95,48.15 U14.132@65.02,48.15
  Bottom Layer w0.2: v1(37.446,47.784) 37.458,47.796 37.458,48.058 38,48.6 38.5,48.6 39,48.1 39.397,48.1 39.797,48.5 40.3,48.5 40.7,48.1 41.108,48.1 41.108,48.108 41.5,48.5 42,48.5 42.4,48.1 42.9,48.1 43.3,48.5 43.751,48.5 44.151,48.1 44.6,48.1 45,48.5 45.4,48.5 45.8,48.1 46.619,48.1 46.819,47.9 v1(46.873,47.9)
FMC_SDNE0: U14.44 U15.19 | length 39.9
  Top Layer w0.2: U15.19@30.145,55.185 31.648,55.185 v1(31.652,55.189) ; v1(42.326,50.655) 43.775,50.655 U14.44@43.78,50.65
  S4 w0.2: v1(31.652,55.189) 36.711,55.189 37.1,54.8 37.1,54.4 36.9,54.2 32.1,54.2 31.9,54 31.9,53.615 32.115,53.4 36.8,53.4 37.1,53.1 37.1,52.6 36.9,52.4 33.8,52.4 33.6,52.2 33.6,51.828 33.928,51.5 34.7,51.5 34.9,51.7 37.6,51.7 37.9,52 37.9,52.5 38.3,52.9 42,52.9 42.6,52.3 42.6,52 42.4,51.8 40.8,51.8 40.6,51.6 40.6,51 40.945,50.655 v1(42.326,50.655)
FMC_SDNRAS: U14.49 U15.18 | length 47
  Top Layer w0.2: U15.18@30.145,54.385 v1@31.404,54.385 ; U14.49@43.78,48.15 46.223,48.15 v1(46.6,48.527)
  S4 w0.2: v1(31.404,54.404) 30.804,54.404 30.4,54 30.4,53.7 30.7,53.7 30.9,53.5 30.9,53.317 30.783,53.2 30.1,53.2 29.968,53.068 29.968,52.882 30.151,52.7 30.783,52.7 30.9,52.583 30.9,52.303 30.783,52.186 30.286,52.186 30.169,52.069 30.169,51.9 30.382,51.687 31.117,51.687 31.235,51.57 31.235,51.404 31,51.169 31,51 31.212,50.788 31.512,50.788 31.825,51.1 32.183,51.1 32.3,50.983 32.3,50.363 32.549,50.114 32.714,50.114 33.2,50.6 33.5,50.6 33.7,50.4 33.7,50 33.9,49.8 34.2,49.8 34.424,50.024 34.424,50.424 34.6,50.6 34.9,50.6 35.1,50.4 35.1,50.1 35.3,49.9 35.596,49.9 35.796,50.1 35.796,50.596 36,50.8 36.4,50.8 36.6,50.6 36.6,49.932 36.732,49.8 37.183,49.8 37.3,49.917 37.3,50.1 37.3,50.683 37.417,50.8 37.783,50.8 37.9,50.683 37.9,50.018 38.118,49.8 38.5,49.8 38.7,50 38.7,50.6 38.9,50.8 39.3,50.8 39.5,50.6 39.5,49.917 39.617,49.8 40,49.8 40.4,50.2 40.7,50.2 40.9,50 40.9,49.6 40.5,49.2 40.5,48.9 40.7,48.7 41.1,48.7 41.5,49.1 41.9,49.1 42.131,48.869 42.131,48.369 42.4,48.1 42.827,48.1 43.1,48.373 43.1,48.783 43.217,48.9 43.6,48.9 43.8,48.7 43.8,48.1 44,47.9 44.183,47.9 44.3,48.017 44.3,48.45 44.5,48.65 45.85,48.65 46.5,49.3 49.3,49.3 49.6,49 49.6,48.417 49.483,48.3 48.642,48.3 48.242,48.7 46.817,48.7 46.644,48.527 v1(46.6,48.527)
FMC_SDNWE: U14.43 U15.16 | length 47.1
  Top Layer w0.2: U15.16@30.145,52.785 31.2,52.785 31.515,53.1 31.983,53.1 32.1,52.983 32.1,52.616 32.217,52.498 32.67,52.498 32.9,52.729 32.9,52.983 33.017,53.1 33.5,53.1 33.715,52.885 33.715,52.785 v1(35.338,51.162)
  Top Layer w0.254: U14.43@43.78,51.15 v1(45.275,51.15)
  Bottom Layer w0.2: v1(35.338,51.162) 34.011,51.162 33.562,51.612 33.208,51.612 32.958,51.362 32.958,50.838 35.123,48.673 35.677,48.673 36.427,49.423 36.427,49.877 36.151,50.153 34.494,50.153 34.156,50.491 34.156,50.656 34.3,50.8 35.6,50.8 35.917,51.117 36.083,51.117 36.467,50.733 36.633,50.733 37.12,51.22 37.397,51.22 37.817,50.8 37.817,49.257 38.023,49.051 38.651,49.051 38.869,49.269 38.869,51.069 39.1,51.3 39.669,51.3 39.799,51.17 39.799,49.301 40,49.1 40.544,49.1 40.661,49.217 40.661,51.076 40.779,51.193 41.364,51.193 41.592,50.964 41.592,49.254 41.71,49.137 42.337,49.137 42.9,49.7 42.9,51.4 43.1,51.6 43.634,51.6 43.967,51.267 43.967,49.406 44.2,49.173 44.693,49.173 44.81,49.29 44.81,50.071 44.927,50.188 45.344,50.188 45.557,50.402 45.557,50.868 v1(45.275,51.15)
GND_IN: BT1.2 C2.1 C3.1 C4.1 C5.1 C6.2 C8.1 C9.1 C10.1 C11.1 C14.1 C15.1 C23.1 C24.1 C26.2 C29.1 C31.2 C34.1 C37.2 C41.1 C43.2 C44.1 C45.2 C48.1 C51.2 C56.2 C57.2 C58.2 C59.2 C60.2 C62.1 C63.2 C64.2 C65.2 C66.2 C67.2 C68.2 C69.2 C70.2 C71.2 C72.2 C73.2 C74.2 C75.2 C76.2 C77.2 C78.2 C79.2 C80.1 C81.2 C82.1 C83.2 C84.2 C85.2 C86.2 C87.2 C88.2 C94.1 C97.1 C98.2 C99.1 CN1.6 CN1.10 CN1.11 CN1.12 CN2.2 D2.2 D3.1 D4.1 D5.2 D6.1 D22.2 J1.2 J1.3 J9.3 J9.6 J9.39 J9.40 J11.5 J11.7 J11.11 R3.1 R4.1 R48.2 R58.2 R65.1 R66.2 R67.2 R75.2 R80.1 R81.1 R82.2 R83.2 R84.2 R89.2 SW1.2 U1.6 U2.1 U3.1 U5.4 U6.2 U6.7 U6.8 U7.2 U7.7 U7.8 U9.4 U10.4 U11.3 U13.4 U14.16 U14.38 U14.51 U14.61 U14.83 U14.94 U14.107 U14.120 U14.130 U14.138 U15.6 U15.12 U15.28 U15.41 U15.46 U15.52 U15.54 U16.4 U17.4 U18.2 U19.11 U19.15 U19.16 U19.17 U19.19 U21.4 U25.2 Y1.2 Y1.4 | length 132.7
  Top Layer w0.2: C82.1@6.859,49.109 C81.2@8.49,49.109 ; C80.1@7.232,60.902 v1(8.032,60.902) ; C81.2@8.5,49.1 C81.2@8.49,49.109 ; C79.2@8.832,60.902 v1(9.632,60.902) ; v1(9.29,49.109) C81.2@8.49,49.109 ; R58.2@9.9,37.4 v1(10.7,37.4) ; R89.2@13.7,37.4 v1(14.5,37.4) ; U17.4@14.305,42.17 v1(15.105,42.17) ; U16.4@14.442,52.02 v1(15.242,52.02) ; v1(16.045,43.089) C84.2@16.845,43.089 16.92,43.089 17.624,42.385 U15.52@18.689,42.385 ; v1(16.045,51.185) C83.2@16.845,51.185 U15.41@18.689,51.185 ; v1(16.6,40.7) 16.638,40.738 18.643,40.738 U15.54@18.689,40.785 ; v1@16.685,47.185 U15.46@18.689,47.185 ; v1@16.685,61.585 U15.28@18.689,61.585 ; v1(18.3,33.6) C97.1@19.1,33.6 ; C97.1@19.313,33.688 C94.1@20.783,33.688 23.212,33.688 23.412,33.488 U19.19@23.412,32.415 ; U15.6@30.145,44.785 31.336,44.785 32.134,43.986 C86.2@32.209,43.986 ; U15.12@30.145,49.585 31.352,49.585 32.134,48.802 C87.2@32.209,48.802 ; v1(31.4,37.6) 31.773,37.973 C85.2@31.773,38.883 ; C88.2@32.21,59.988 v1(33.01,59.988) ; C77.2@40.094,48.267 40.107,48.254 41.846,48.254 42.921,47.179 43.751,47.179 U14.51@43.78,47.15 ; C76.2@40.1,54.8 40.119,54.781 41.787,54.781 C65.2@41.805,54.763 41.837,54.763 42.921,53.679 43.751,53.679 U14.38@43.78,53.65 ; C78.2@40.111,43.221 40.117,43.215 41.799,43.215 C67.2@41.805,43.209 41.88,43.209 42.939,42.15 U14.61@43.78,42.15 ; CN1.11@43.784,2.102 v1(45.36,2.102) ; R48.2@44.3,62.55 v1(44.3,63.8) ; CN1.6@46.774,4.502 46.798,4.526 v1(46.798,6.102) ; R75.2@46.798,65.156 v1(46.798,65.956) ; v1(49.205,60.827) 49.205,60.773 49.5,60.478 C57.2@49.5,59.6 ; C69.2@49.534,32.794 49.534,32.815 49.888,33.169 49.909,33.169 50.182,33.442 50.257,33.442 50.65,33.835 U14.83@50.65,34.78 ; v1(49.9,63) Y1.4@50.7,63 ; CN1.10@51.084,15.252 51.135,15.2 v1(52.9,15.2) ; Y1.2@53.6,61.4 v1(54.4,61.4) ; C56.2@54.6,59.6 54.6,59.675 55.321,60.396 55.321,60.88 v1(55.337,60.896) ; C70.2@55.1,32.794 55.1,32.869 55.707,33.476 55.782,33.476 56.15,33.844 U14.94@56.15,34.78 ; v1(55.358,1.102) CN1.12@56.934,1.102 ; U14.16@55.65,56.02 55.65,56.95 55.8,57.1 55.975,57.1 56.7,57.825 C63.2@56.7,57.9 ; C62.1@61,65.8 v1(61,66.6) ; U14.107@62.65,34.78 62.65,33.65 63.399,32.901 C59.2@63.399,32.815 ; v1(63.4,61.3) 63.42,61.32 64.28,61.32 R81.1@64.3,61.34 ; U14.120@65.02,42.15 66.35,42.15 66.962,41.538 66.962,41.212 C72.2@67.19,40.984 ; U14.130@65.02,47.15 66.25,47.15 66.5,46.9 66.5,46.65 67.115,46.035 C73.2@67.19,46.035 ; U14.138@65.02,51.15 66.65,51.15 66.9,51.4 66.9,51.771 C74.2@67.19,52.061 v1(67.99,52.061) ; R80.1@65.88,64.7 v1(65.88,65.5) ; U21.4@68.1,59.5 v1(68.9,59.5) ; C98.2@69.16,64.7 v1(69.16,65.5) ; C99.1@70.8,64.7 v1(70.8,65.5) ; R65.1@72.537,64.635 v1(72.537,65.435) ; C45.2@73.1,38.35 77.05,38.35 77.5,37.9 U11.3@77.5,36.95 ; R67.2@75.435,56.541 v1(76.235,56.541) ; R66.2@75.435,61.481 v1(76.235,61.481) ; v1(78.273,28.092) C41.1@78.273,28.892 78.274,28.894 79.994,28.894 C43.2@79.995,28.895 80.057,28.958 82.082,28.958 U10.4@82.145,29.02 ; v1(80.498,47.923) C34.1@81.298,47.923 ; v1(80.509,46.287) C37.2@81.309,46.287 ; v1(80.561,57.676) C23.1@81.361,57.676 ; v1(80.569,24.851) C48.1@81.369,24.851 81.392,24.828 81.392,23.193 C51.2@81.415,23.17 ; v1(81.522,71.342) C24.1@81.522,70.542 C26.2@81.522,68.869 81.522,67.378 82.1,66.8 U6.2@83.088,66.8 ; v1(81.622,13.467) C29.1@81.622,12.667 ; C29.1@81.632,12.677 C29.1@81.622,12.667 ; v1(82.921,39.834) U9.4@82.921,40.634 ; U7.2@83,9 81.9,9 81.613,9.287 C31.2@81.613,11.054 81.622,11.063 C29.1@81.622,12.667 ; v1(83.018,16.75) U13.4@83.018,17.55 ; U6.8@83.088,62.99 U6.7@83.088,63.625
  Top Layer w0.5: R4.1@51.9,81.1 52.473,80.527 52.473,80.482 53.173,79.782 53.173,79.524 53.365,79.332
  Top Layer w1: C2.1@46.75,78.75 C3.1@48.85,78.75 ; C3.1@49.025,78.75 49.64,78.135 U1.6@51.6,78.135 53.365,78.135 ; R4.1@51.9,81.1 51.9,82.614 52.371,83.085 53.875,83.085 C6.2@53.99,83.2 ; 53.365,79.332 53.365,78.135 ; D2.2@54.185,72.6 54.185,77.315 53.365,78.135
  other v1: 49.1,18.2 60.4,18.2 65.5,18.3 45.9,20.4 62.6,22.7 45.9,24.3 46.3,28.5 65.1,29.4 52.5,29.6 34.3,32 35.4,32 32.386,32.674 30.7,32.7 61.3,36.6 52.627,38.639 68.7,40.4 55.6,41.4 55.6,42.4 69.6,46 16.646,47.146 69.3,54.3 65.3,55.9 16.646,61.546
  other v3: 54,18.3
I2C1_SCL: R14.2 R43.2 U5.3 U14.136 | length 20.3
  Top Layer w0.2: U14.136@65.02,50.15 69.35,50.15 69.387,50.113 69.408,50.113 69.7,49.821 R43.2@69.7,49.8 ; R43.2@69.7,49.779 70.054,49.425 70.075,49.425 70.6,48.9 76.784,48.9 80.249,52.365 80.27,52.365 80.563,52.658 R14.2@80.563,52.678 81.767,52.678 82.494,53.405 U5.3@82.969,53.405
I2C1_SDA: R12.1 R44.2 U5.2 U14.137 | length 20.2
  Top Layer w0.2: U14.137@65.02,50.65 68.85,50.65 69.387,51.187 69.408,51.187 69.7,51.479 R44.2@69.7,51.5 ; R44.2@69.7,51.521 70.054,51.875 70.075,51.875 70.5,52.3 73.2,52.3 75.3,54.4 79.663,54.4 80.284,55.021 80.305,55.021 80.597,55.314 R12.1@80.597,55.334 81.835,55.334 82.494,54.675 U5.2@82.969,54.675
ISO_I2C_SCL: J3.2 R15.2 U5.6 | length 32.6
  Top Layer w0.254: U5.6@88.369,53.405 90.602,53.405 90.869,53.138 90.869,52.28 91.018,52.131 95.131,52.131 96,53 109.5,53 114.426,57.926 J3.2@117.5,57.926
ISO_I2C_SDA: J3.3 R13.1 U5.7 | length 32.8
  Top Layer w0.254: U5.7@88.369,54.675 88.435,54.741 90.776,54.741 R13.1@90.869,54.834 90.869,55.72 91.018,55.869 95.131,55.869 96,55 108.5,55 113.966,60.466 J3.3@117.5,60.466
ISO_RS232_RX: U11.9 U13.2 | length 24.8
  Top Layer w0.2: v1(77,33.9) 77,24.4 81.31,20.09 U13.2@83.018,20.09 ; v1(77,40) U11.9@77,41.35
  S2 w0.2: v1(77,33.9) v1(77,40)
ISO_RS232_TX: U11.7 U13.3 | length 26.9
  Top Layer w0.2: v1(76.573,32.6) 76.573,28.596 76.4,28.423 76.4,23.8 81.38,18.82 U13.3@83.018,18.82 ; v1(78,40) U11.7@78,41.35
  S2 w0.2: v1(76.573,32.6) 78,34.027 v1(78,40)
ISO_RS485_RX: U10.1 U11.2 | length 7.7
  Top Layer w0.2: U11.2@77,36.95 77,35.5 79.67,32.83 U10.1@82.145,32.83
ISO_RS485_TX: U10.2 U11.4 | length 11
  Top Layer w0.2: U11.4@78,36.95 78,35.7 78.8,34.9 82.8,34.9 83.3,34.4 83.3,31.737 83.183,31.62 82.204,31.62 U10.2@82.145,31.56
ISO_SPI_CS: D12.2 J4.5 R17.1 | length 27.6
  Top Layer w0.2: R17.1@93.578,67.818 104.418,67.818 112.1,75.5 113.86,75.5 114.498,76.138 114.6,76.138 114.813,76.35 D12.2@114.813,76.453 114.84,76.48 J4.5@117.5,76.48
ISO_SPI_MISO: D10.2 J4.3 R21.1 | length 26.9
  Top Layer w0.254: R21.1@93.578,64.485 105.585,64.485 111.1,70 113.399,70 114.525,71.125 114.627,71.125 114.813,71.311 D10.2@114.813,71.413 114.826,71.4 J4.3@117.5,71.4
ISO_SPI_MOSI: D9.2 J4.2 R23.1 | length 26.5
  Top Layer w0.254: R23.1@93.578,62.818 106.318,62.818 111.493,67.993 114.008,67.993 114.812,68.798 D9.2@114.812,68.9 114.853,68.86 J4.2@117.5,68.86
ISO_SPI_SCK: D11.2 J4.4 R19.1 | length 27.2
  Top Layer w0.254: R19.1@93.576,66.152 105.152,66.152 112,73 113.873,73 114.525,73.651 114.627,73.651 114.813,73.837 D11.2@114.813,73.939 J4.4@117.5,73.94
ISO_USART2_CTS: D15.2 J5.4 R27.1 | length 26.9
  Top Layer w0.2: R27.1@93.2,8.167 93.833,8.8 106.9,8.8 111.2,13.1 113.626,13.1 114.498,13.972 114.6,13.972 114.813,14.184 D15.2@114.813,14.287 114.829,14.27 J5.4@117.5,14.27
ISO_USART2_RTS: D16.2 J5.5 R25.1 | length 27.2
  Top Layer w0.2: R25.1@93.2,9.9 105.9,9.9 111.4,15.4 113.388,15.4 114.498,16.51 114.6,16.51 114.813,16.722 D16.2@114.813,16.825 114.827,16.81 J5.5@117.5,16.81
ISO_USART2_RX: D14.2 J5.3 R29.1 | length 26.6
  Top Layer w0.2: R29.1@93.2,6.433 94.467,7.7 108.7,7.7 111.4,10.4 113.498,10.4 114.498,11.4 114.6,11.4 114.813,11.612 D14.2@114.813,11.715 114.828,11.73 J5.3@117.5,11.73
ISO_USART2_TX: D13.2 J5.2 R31.1 | length 26.2
  Top Layer w0.2: R31.1@93.2,4.7 95.4,6.9 112.59,6.9 114.497,8.808 114.6,8.808 114.812,9.02 D13.2@114.812,9.123 114.88,9.19 J5.2@117.5,9.19
LCD-PWMCONTROL: J9.20 U14.98 | length 15.4
  Top Layer w0.2: U14.98@58.15,34.78 58.15,30.25 59.828,28.572 59.828,22.872 60.46,22.24 J9.20@60.46,20.365
LCD_SCL: J9.16 R78.1 R81.2 U14.81 U21.2 | length 92.4
  Top Layer w0.2: U14.81@49.621,34.121 49.621,34.751 U14.81@49.65,34.78 49.65,41.95 54.2,46.5 v1(57,46.5) ; v1(63,18.332) J9.16@63,20.365 ; R81.2@65.9,61.34 65.9,60.52 ; U21.2@67.555,60.825 67.53,60.8 66.6,60.8 66.32,60.52 65.9,60.52 ; v1(73.3,55.2) 71.6,55.2 68.2,58.6 v1(65.9,58.6) R78.1@65.9,59.7 65.9,60.52
  S1 w0.2: v1(63,18.332) 65.368,20.7 69.5,20.7 72.1,23.3 72.1,54 v1(73.3,55.2)
  S4 w0.2: v1(57,46.5) 57,49.6 60.5,53.1 61.5,53.1 65.9,57.5 v1(65.9,58.6)
LCD_SDA: J9.18 R79.1 R80.2 U14.82 U21.1 | length 103.3
  Top Layer w0.2: U14.82@50.15,34.78 50.15,41.55 54.5,45.9 v1(56.3,45.9) ; v1(61.73,18.332) J9.18@61.73,20.365 ; R79.1@67.52,63.1 66.583,63.1 ; U21.1@67.555,61.475 67.135,61.475 67.008,61.603 67.008,62.392 66.7,62.7 66.7,62.983 66.583,63.1 ; v1(73.964,54.536) 71.164,54.536 68.2,57.5 66,57.5 65.116,58.384 65.116,61.875 64.702,62.289 64.702,63.098 v1(64.7,63.1) R80.2@65.88,63.1 66.583,63.1
  S1 w0.2: v1(61.73,18.332) 62.262,17.8 63.3,17.8 65.6,20.1 69.8,20.1 72.6,22.9 72.6,53.172 v1(73.964,54.536)
  S4 w0.2: v1(56.3,45.9) 56.3,50.1 60.1,53.9 60.1,54.7 62.8,57.4 62.8,59.8 64.7,61.7 v1(64.7,63.1)
LTDC_B0: J9.8 U14.3 | length 39.9
  Top Layer w0.2: J9.8@68.08,20.365 68.1,20.385 v1(68.1,22.7)
  Top Layer w0.254: v1(62.15,54.525) U14.3@62.15,56.02
  S1 w0.2: v1(62.15,54.525) 62.15,52.05 70,44.2 70,24.318 69.381,23.7 68.394,22.713 68.113,22.713 v1(68.1,22.7)
LTDC_B1: J9.15 U14.111 | length 14.5
  Top Layer w0.254: J9.15@63,24.965 v1(63,26.9) ; v1(63.802,37.683) 63.819,37.667 65.003,37.667 U14.111@65.02,37.65
  S1 w0.2: v1(63,26.9) 62.993,26.907 62.993,37.3 63.338,37.645 63.764,37.645 v1(63.802,37.683)
LTDC_B2: J9.7 U14.125 | length 23.8
  Top Layer w0.2: J9.7@68.08,24.965 v1(68.08,26.998)
  Top Layer w0.254: v1(63.525,44.65) U14.125@65.02,44.65
  S1 w0.2: v1(63.525,44.65) 64.85,44.65 68.08,41.42 68.08,36.901 68.08,28 v1(68.08,26.998)
LTDC_B3: J9.19 U14.100 | length 13.4
  Top Layer w0.2: J9.19@60.46,24.965 60.5,25.005 v1(60.5,26.9)
  Top Layer w0.254: U14.100@59.15,34.78 v1(59.15,36.275)
  S1 w0.2: v1(59.15,36.275) 60.5,34.925 v1(60.5,26.9)
LTDC_B4: J9.17 U14.112 | length 15.9
  Top Layer w0.2: v1(61.7,26.9) 61.7,24.995 J9.17@61.73,24.965
  Top Layer w0.254: v1(63.525,38.15) U14.112@65.02,38.15
  S1 w0.2: v1(61.7,26.9) 61.7,30.4 62.4,31.1 62.4,37.8 62.75,38.15 v1(63.525,38.15)
LTDC_B5: J9.32 U14.37 | length 39.5
  Top Layer w0.2: J9.32@52.851,20.365 52.9,20.414 v1(52.9,22.4)
  Top Layer w0.254: U14.37@43.78,54.15 v1(45.275,54.15)
  S1 w0.2: v1(45.275,54.15) 45.275,53.225 45.937,52.563 46.863,52.563 49.9,49.525 49.9,41.2 49.9,36.8 49.9,30.542 53.5,26.942 53.5,23 v1(52.9,22.4)
LTDC_B6: J9.13 U14.110 | length 14
  Top Layer w0.2: v1(63.525,37.15) U14.110@65.02,37.15 ; J9.13@64.27,24.965 64.3,24.995 v1(64.3,27)
  S1 w0.2: v1(63.525,37.15) 64.3,36.375 v1(64.3,27)
LTDC_B7: J9.11 U14.116 | length 22.5
  Top Layer w0.2: v1(65.5,22.9) 65.5,24.925 J9.11@65.54,24.965
  Top Layer w0.254: v1(63.525,40.15) U14.116@65.02,40.15
  S1 w0.2: v1(63.525,40.15) 64.05,40.15 64.2,40 66.2,38 66.2,36.8 66.2,36.791 66.2,32.3 66.2,29.391 66.2,23.8 66.2,23.6 v1(65.5,22.9)
LTDC_CLK: J9.27 U14.92 | length 13.7
  Top Layer w0.2: v1(55.019,27.905) 55.38,27.545 J9.27@55.38,24.965
  Top Layer w0.254: v1(55.1,36.6) 55.104,36.596 55.104,35.938 55.15,35.892 U14.92@55.15,34.78
  Bottom Layer w0.2: v1(55.019,27.905) 55.058,27.944 55.058,28.08 55.1,28.122 v1(55.1,36.6)
LTDC_DE: J9.24 U14.22 | length 63.7
  Top Layer w0.2: v1(52.632,53.734) 52.641,53.743 52.641,56.011 U14.22@52.65,56.02 ; v1(57.92,18.332) J9.24@57.92,20.365
  S1 w0.2: v1(52.632,53.734) 52.632,55.368 51.6,56.4 45.3,56.4 43.1,54.2 43.1,25.7 51.1,17.7 54.211,17.7 54.843,18.332 v1(57.92,18.332)
LTDC_G0: J9.10 U14.4 | length 45.9
  Top Layer w0.2: J9.10@66.81,20.365 v1(66.81,22.398)
  Top Layer w0.254: v1(61.641,54.136) 61.645,54.141 61.645,56.015 U14.4@61.65,56.02
  S1 w0.2: v1(61.641,54.136) 61.641,55.141 61.9,55.4 62.8,55.4 64.2,54 64.2,52.7 70.7,46.2 70.7,23.7 69,22 67.208,22 v1(66.81,22.398)
LTDC_G1: J9.12 U14.5 | length 50.5
  Top Layer w0.2: v1(65.5,22.2) 65.489,22.189 65.489,20.416 J9.12@65.54,20.365
  Top Layer w0.254: v1(61.086,54.029) 61.086,54.068 61.15,54.133 U14.5@61.15,56.02
  S1 w0.2: v1(61.086,54.029) 61.086,55.386 61.6,55.9 63.2,55.9 65.127,53.973 65.127,53.373 71.5,47 71.5,23.6 69.4,21.5 66.2,21.5 v1(65.5,22.2)
LTDC_G2: J9.38 U14.42 | length 37.2
  Top Layer w0.2: J9.38@49.041,20.365 v1(49.041,22.398)
  Top Layer w0.254: U14.42@43.78,51.65 43.788,51.642 45.747,51.642 v1(45.755,51.635)
  S1 w0.2: v1(45.755,51.635) 44.335,51.635 43.6,50.9 43.6,27.839 v1(49.041,22.398)